# Altium PCB SiLPA_HE.PcbDoc (part 8 of 10)
Units mm, origin at the board's own origin, x right, y up, seen from the top; angles counter-clockwise.
Board outline 222.47 x 100.01 mm, 4 copper layers (Top Layer, Int1 (GND), Int2 (PWR), Bottom Layer), stack 1.508 mm thick; 661 components, 355 nets, 1925 pads, 1744 vias.
Unrouted connection lines stored in the file: 360.
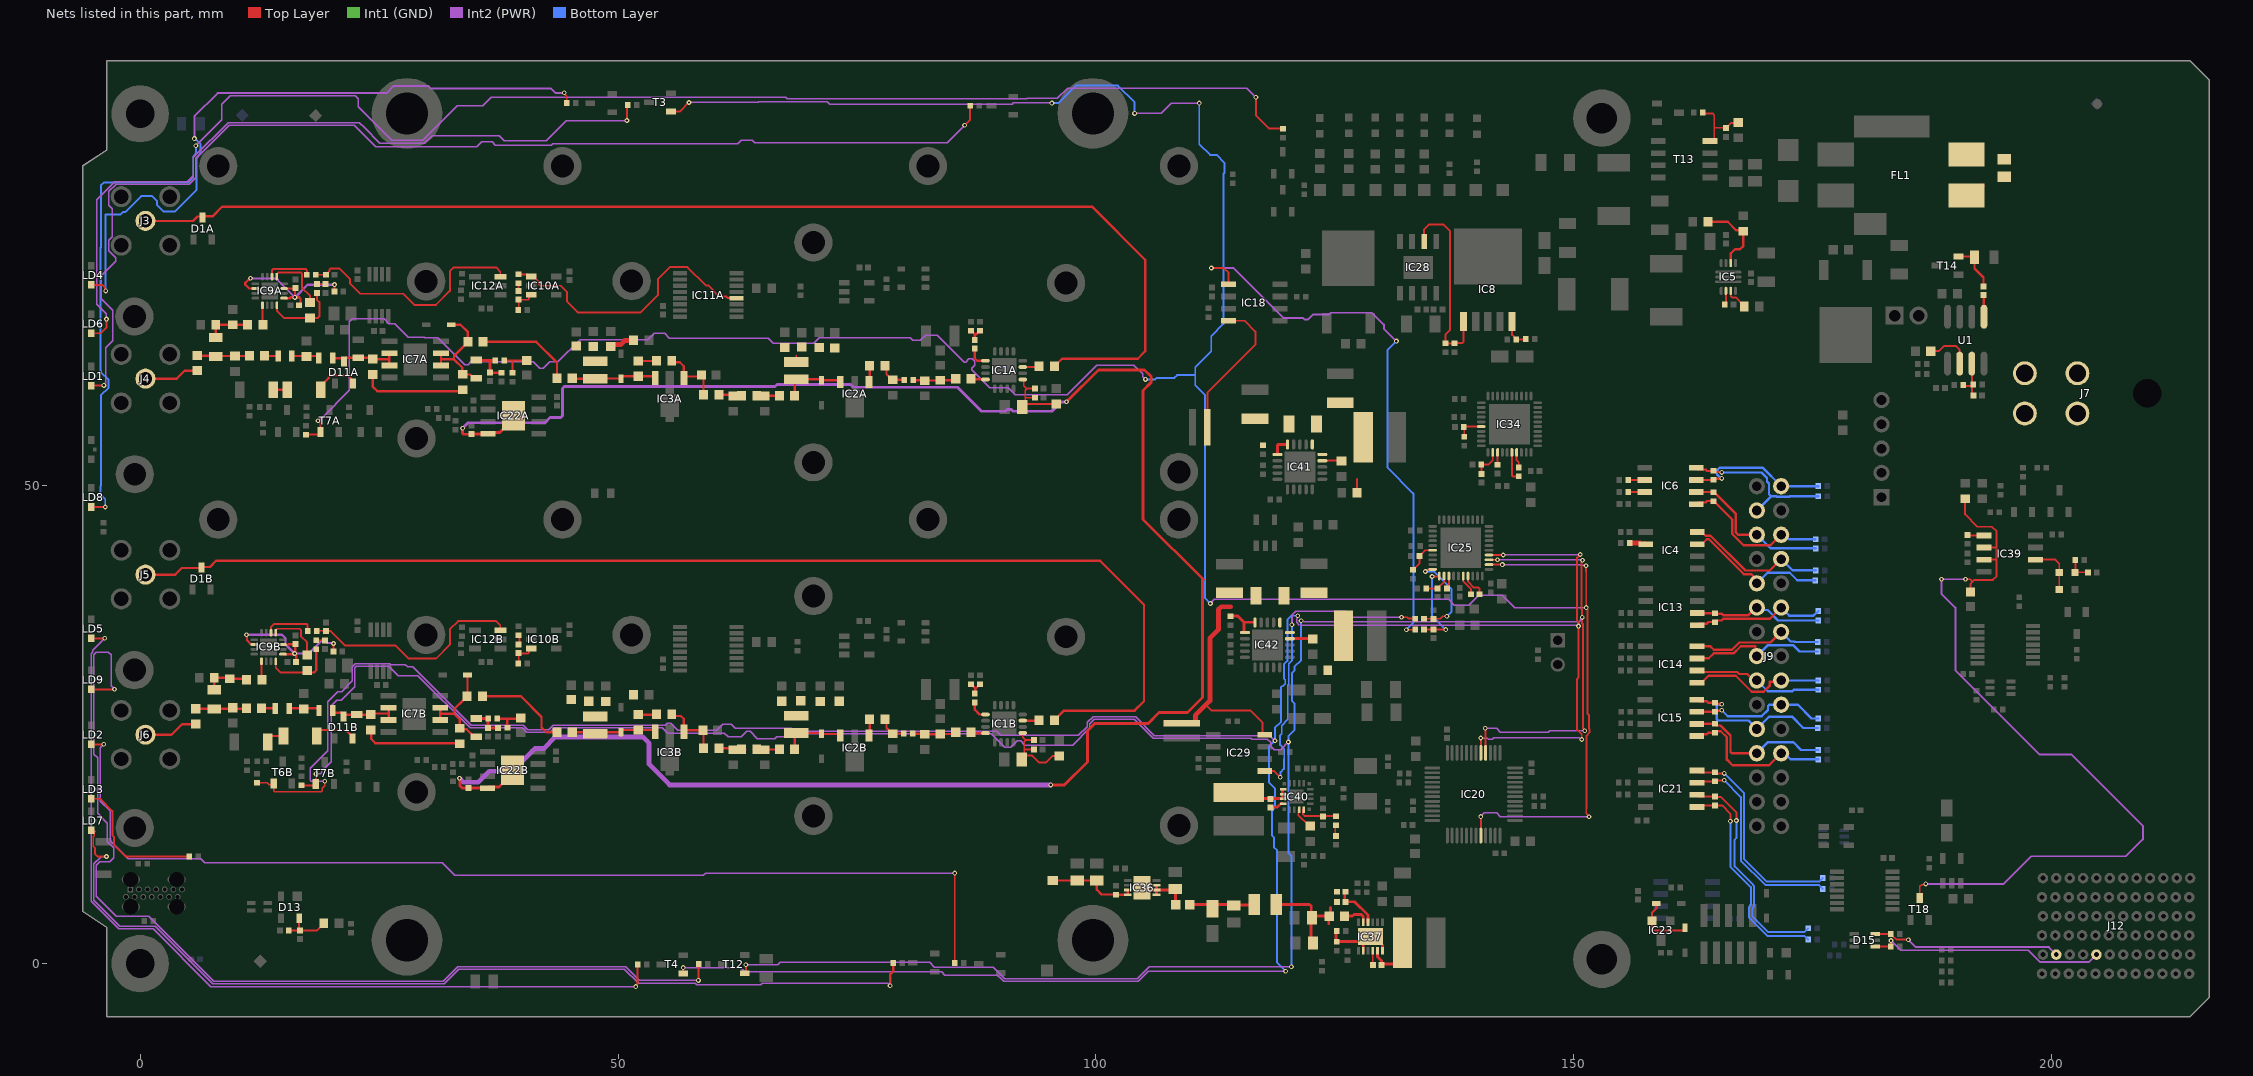
[diagram p7: the nets of this part, all layers, seen from the top]

## Via types
v1: diameter 0.5, hole 0.25, Top Layer to Bottom Layer, tented both sides, 1439 vias
v2: diameter 0.5, hole 0.25, Top Layer to Bottom Layer, tented bottom, 291 vias
v3: diameter 0.5, hole 0.25, Top Layer to Bottom Layer, 12 vias
v4: diameter 0.5, hole 0.25, Top Layer to Bottom Layer, tented top, 2 vias

## Nets (pads, with @x,y where several pads share a name; then routed paths per layer and width w, separated by ;. In a path a pad name is that pad's centre, name@x,y a point inside that pad or via, vN(x,y) a via of type N, cw(c..) or ccw(c..) an arc to the next point about the centre after c; other vN are vias at no path point) (continued)
I_bias0_1: IC20.20 IC25.2 R71A.1 T3.1 T7A.1 | length 320.1
  Top Layer w0.2: R71A.1@17.406,55.355 18.65,55.355 18.875,55.58 18.875,56.513 v1(18.606,56.782) ; T3.1@55.541,89.152 56.491,89.152 v1(57.421,90.083) ; IC20.20@140.263,13.393 v1@140.262,15.371 ; IC25.2@141.117,41.743 v1(142.521,41.743) ; v1(151.262,41.614) 151.262,41.047 151.287,41.023 151.287,37.16 151.433,37.014 151.433,26.127 151.58,25.98 151.58,24.577 151.613,24.544 151.613,24.149 151.317,23.853 151.317,16.236 151.293,16.212 151.293,15.731 151.438,15.586 151.438,15.573 151.58,15.431 v1(151.58,15.35)
  Int2 (PWR) w0.15: v1(18.606,56.782) 18.617,56.782 18.947,57.112 19.053,57.112 21.899,59.958 21.899,67.122 22.211,67.434 25.537,67.434 26.028,66.943 26.653,66.943 28.06,65.536 29.705,65.536 29.786,65.454 31.162,65.454 33.947,62.67 34.321,62.67 34.598,62.947 41.14,62.947 41.799,62.288 42.173,62.288 42.832,62.947 43.708,62.947 46.025,65.263 53.097,65.263 53.78,65.946 54.872,65.946 55.381,65.437 65.693,65.437 66.239,64.891 70.496,64.891 71.061,65.456 80.56,65.456 80.825,65.191 81.614,65.191 82.17,65.746 83.401,65.746 86.234,62.913 86.359,62.913 86.698,63.253 87.073,63.253 87.338,62.988 87.338,62.614 86.998,62.274 86.998,62.15 88.889,60.259 90.83,60.259 91.557,59.532 97.01,59.532 100.091,62.614 103.966,62.614 104.879,61.7 104.879,61.416 v1(105.177,61.118) ; v1(57.421,90.083) 64.653,90.083 64.738,90.168 71.875,90.168 72.133,89.91 91.234,89.91 91.355,90.031 95.375,90.031 v1(95.388,90.018) ; v1(104.037,88.943) 106.81,88.943 107.885,90.018 v1(110.802,90.018) ; v1(111.971,37.668) 112.398,38.095 136.908,38.095 137.503,37.5 139.007,37.5 140.032,38.525 142.514,38.525 143.798,37.241 v1(151.287,37.241) ; v1(140.262,15.372) 140.644,15.754 141.922,15.754 142.309,15.367 151.563,15.367 v1(151.58,15.35) ; v1(142.521,41.743) 150.594,41.743 150.67,41.667 151.209,41.667 v1(151.262,41.614)
  Bottom Layer w0.2: v1(95.388,90.018) 96.052,90.018 97.877,91.843 102.284,91.843 104.037,90.09 v1(104.037,88.943) ; v1(105.177,61.118) 106.19,61.118 106.346,61.274 108.203,61.274 108.487,61.558 110.381,61.558 ; v1(110.802,90.018) 110.802,85.731 111.938,84.596 112.609,84.596 113.433,83.772 113.433,82.709 113.34,82.616 113.34,66.919 112.063,65.642 112.063,64.073 110.381,62.391 110.381,61.558 ; v1(111.971,37.668) 111.42,38.22 111.42,59.446 110.381,60.485 110.381,61.558
I_bias1_0: IC20.41 IC25.4 R62B.1 T4.1 T6B.1 | length 303.8
  Top Layer w0.15: R62B.1@12.184,18.939 13.298,18.939 13.529,18.708 13.768,18.708 13.981,18.494 13.981,18.059 14.069,17.971 18.965,17.971 19.052,18.059 19.052,18.331 19.323,18.602 v1(19.323,19.076)
  Top Layer w0.2: T4.1@56.813,-1.039 v1(56.813,-0.417) ; IC20.41@140.263,22.043 v1(140.263,23.594) ; IC25.4@141.117,42.743 v1(142.605,42.743) ; v1(150.655,42.791) 150.328,42.464 150.328,35.868 150.478,35.718 v1(150.478,35.306) 150.478,29.912 150.335,29.769 150.335,24.455 150.815,23.975 v1(150.815,23.44)
  Int2 (PWR) w0.15: v1(19.323,19.076) 17.871,19.076 17.783,19.164 17.783,20.425 19.612,22.254 19.612,27.407 20.662,28.457 21.069,28.457 22.179,29.567 22.179,31.06 22.508,31.389 26.139,31.389 26.247,31.281 27.753,31.281 27.993,31.041 28.532,31.041 34.63,24.943 40.077,24.943 40.555,24.465 42.768,24.465 43.246,24.943 54.936,24.943 55.139,25.146 55.515,25.146 56.242,24.419 60.317,24.419 60.944,25.046 61.818,25.046 62.255,24.609 68.099,24.609 68.413,24.296 89.599,24.296 90.032,23.863 98.163,23.863 99.094,24.795 99.094,25.225 99.694,25.825 104.145,25.825 106.118,23.852 115.928,23.852 118.173,23.852 v1(118.725,23.3) ; v1(56.813,-0.417) 62.82,-0.417 63.273,-0.87 83.849,-0.87 84.181,-1.201 89.694,-1.201 90.077,-1.584 90.083,-1.584 90.36,-1.861 104.419,-1.861 104.696,-1.584 104.703,-1.584 105.467,-0.82 v1@119.927,-0.82 ; v1(121.1,36.385) 121.033,36.319 121.033,36.086 121.009,36.061 121.009,35.686 121.274,35.42 ; 121.361,35.395 150.294,35.395 150.316,35.373 150.411,35.373 v1(150.478,35.306) ; v1(140.263,23.594) 140.95,23.594 141.074,23.471 141.448,23.471 141.595,23.618 150.544,23.618 150.721,23.44 v1(150.815,23.44) ; v1(142.605,42.743) 142.629,42.767 150.631,42.767 v1(150.655,42.791)
  Bottom Layer w0.2: v1(119.84,-0.795) 118.959,0.086 118.959,11.835 118.603,12.191 118.603,13.19 118.415,13.378 118.415,16.006 118.728,16.318 118.728,18.317 118.09,18.955 118.09,22.665 v1(118.725,23.3) 118.728,23.303 118.728,24.658 119.34,25.271 119.34,28.897 119.457,29.014 119.518,29.014 119.797,29.293 119.797,29.688 119.667,29.818 119.667,31.305 120.024,31.662 120.024,35.961 120.449,36.385 v1(121.1,36.385)
I_bias1_1: IC20.40 IC25.3 R71B.1 T7B.1 T12.1 | length 289.4
  Top Layer w0.2: R71B.1@16.864,18.641 18.241,18.641 T7B.1@18.375,18.775 18.397,18.797 v1(18.397,19.84) ; T12.1@63.265,-0.999 63.377,-0.887 v1(63.377,-0.132) ; v1(140.72,24.624) 140.744,24.6 140.744,22.062 IC20.40@140.763,22.043 ; IC25.3@141.117,42.243 v1(142.011,42.243) ; v1(150.896,42.194) 150.896,42.113 150.785,42.002 150.785,39.187 150.81,39.163 150.81,37.044 150.866,36.988 v1(150.866,36.212) 150.866,35.593 150.955,35.504 150.955,24.609 151.136,24.428 v1(151.136,24.347)
  Int2 (PWR) w0.15: v1(18.397,19.84) 18.403,19.846 18.872,19.846 18.981,19.955 18.981,20.251 19.167,20.436 19.296,20.436 19.981,21.121 19.981,26.981 20.553,27.553 21.037,27.553 22.456,28.973 22.456,30.945 22.622,31.112 26.024,31.112 27,30.135 29.046,30.135 34.515,24.666 39.963,24.666 40.44,24.188 42.883,24.188 43.361,24.666 54.646,24.666 55.19,24.122 61.128,24.122 61.508,23.742 62.915,23.742 63.462,24.289 63.836,24.289 64.584,23.541 66.408,23.541 66.609,23.742 67.897,23.742 68.174,24.019 89.05,24.019 90.435,22.634 91.085,22.634 91.754,23.303 92.128,23.303 92.566,22.865 97.556,22.865 99.371,24.68 99.371,25.11 99.811,25.55 104.029,25.55 106.002,23.577 116.168,23.577 116.271,23.474 117.936,23.474 118.277,23.133 118.277,22.738 118.481,22.534 118.481,22.509 118.63,22.36 119.308,22.36 v1(120.134,23.186) ; v1(63.377,-0.132) 66.7,-0.132 66.969,0.136 82.59,0.136 83.093,-0.367 89.255,-0.367 90.195,-1.307 90.198,-1.307 90.475,-1.584 104.304,-1.584 104.581,-1.307 104.585,-1.307 105.55,-0.342 v1(120.44,-0.342) ; v1(121.462,35.874) 121.529,35.807 121.626,35.807 v1@121.65,35.784 ; 121.737,35.758 150.538,35.758 150.644,35.865 150.644,35.895 150.866,36.117 v1(150.866,36.212) ; v1(140.72,24.624) 141.909,24.624 142.319,24.214 147.328,24.214 147.461,24.347 v1(151.136,24.347) ; v1(142.011,42.243) 150.847,42.243 v1(150.896,42.194)
  Bottom Layer w0.2: v1(120.44,-0.342) 120.44,11.269 120.134,11.575 v1(120.134,23.186) 120.134,23.793 120.762,24.421 120.762,27.215 120.492,27.485 120.492,30.378 120.762,30.648 120.762,31.045 121.462,31.745 v1(121.462,35.874)
Isense_0: IC18.5 R182.2 | length 59.4
  Top Layer w0.2: v1(112.077,72.765) 113.369,72.765 113.865,72.27 113.865,71.071 IC18.5@113.852,71.059 ; v1(132.475,34.925) 133.219,34.925 R182.2@133.291,34.997
  Int2 (PWR) w0.2: v1(112.077,72.765) 114.401,72.765 119.615,67.551 121.655,67.551 121.812,67.394 122.207,67.394 122.723,67.909 124.37,67.909 124.548,68.088 128.87,68.088 130.121,66.837 130.121,66.429 v1(131.43,65.12)
  Bottom Layer w0.2: v1(131.43,65.12) 130.513,64.204 130.513,51.868 133.151,49.23 133.21,49.171 133.21,35.66 v1(132.475,34.925)
Isense_1: IC29.5 R183.2 | length 33.1
  Top Layer w0.2: IC29.5@117.576,20.163 118.597,20.163 v1(119.27,19.49) ; v1(131.964,36.236) 132.585,36.236 132.724,36.097 R183.2@133.291,36.097
  Int2 (PWR) w0.2: v1(120.501,35.438) 120.501,36.461 120.902,36.862 126.079,36.862 126.706,36.236 v1(131.964,36.236)
  Bottom Layer w0.2: v1(119.27,19.49) 119.314,19.533 119.314,20.04 119.65,20.376 119.65,21.393 119.693,21.437 119.693,22.446 119.27,22.869 119.27,23.883 119.438,24.051 119.438,24.906 120.067,25.535 120.067,29.101 120.165,29.199 120.165,31.341 120.501,31.677 v1(120.501,35.438)
LED_bias00: LD4.1 R11.1 | length 71.3
  Top Layer w0.2: -4.723,70.981 -3.914,70.981 -3.658,70.725 -3.658,70.433 v1(-3.6,70.376) ; v1(44.377,91.093) 44.377,90.992 44.632,90.737 44.632,90.058 R11.1@44.647,90.043
  Int2 (PWR) w0.2: v1(5.677,86.305) 5.677,88.643 8.1,91.066 23.099,91.066 25.789,91.066 26.535,91.812 27.901,91.812 30.127,91.812 30.396,91.543 42.99,91.543 43.44,91.093 v1(44.377,91.093)
  Bottom Layer w0.2: v1(-3.6,70.376) -3.6,78.385 -2.029,78.385 -1.768,78.646 -1.512,78.646 0.045,80.203 0.145,80.303 1.22,80.303 1.776,79.748 1.776,79.341 2.419,78.698 3.658,78.698 5.9,80.94 5.9,84.315 6.314,84.73 6.314,85.759 6.035,86.039 6.024,86.039 5.758,86.305 v1(5.677,86.305)
LED_bias01: LD6.1 R12.1 | length 79.1
  Top Layer w0.2: -4.723,65.943 -4.105,65.943 -3.521,66.528 v1(-3.521,67.424) ; v1(50.927,88.197) 50.927,89.708 R12.1@51.022,89.803
  Int2 (PWR) w0.15: v1(-3.521,67.424) -3.521,67.983 -4.523,68.985 -4.523,79.924 -2.634,81.813 4.932,81.813 5.56,82.441 5.56,84.334 9.196,87.97 22.935,87.97 23.429,87.476 23.433,87.476 25.092,85.817 29.751,85.817 30.54,86.606 37.572,86.606 38.078,86.1 42.501,86.1 44.598,88.197 v1(50.927,88.197)
LED_bias10: LD5.1 R14.1 | length 92.2
  Top Layer w0.2: -4.723,34.025 v1(-3.701,34.025) ; v1(51.852,-2.407) 51.852,-2.313 52.033,-2.132 52.033,-0.119 R14.1@52.063,-0.089
  Int2 (PWR) w0.15: v1(-3.701,34.025) -4.95,32.776 -4.95,32.597 -5.127,32.42 -5.127,6.504 -2.245,3.622 1.382,3.622 7.411,-2.407 7.523,-2.407 v1(51.852,-2.407)
LED_bias11: LD9.1 R15.1 | length 104.9
  Top Layer w0.2: -4.723,28.693 v1(-2.682,28.693) ; v1(58.406,-1.76) 58.406,-0.079 R15.1@58.436,-0.049
  Int2 (PWR) w0.15: v1(-2.682,28.693) -3.04,29.052 -3.04,32.291 -3.319,32.57 -4.585,32.57 -4.85,32.305 -4.85,21.915 -4.451,21.516 -4.451,15.719 -3.424,14.692 -3.424,12.754 -2.775,12.105 -2.775,11.086 -3.193,10.667 -4.208,10.667 -4.57,10.305 -4.57,7.028 -2.478,4.936 0.917,4.936 7.701,-1.848 31.703,-1.848 33.242,-0.31 50.791,-0.31 52.241,-1.76 v1(58.406,-1.76)
LED_DIS0: LD1.1 R74.1 | length 121.5
  Top Layer w0.2: -4.723,60.49 v1(-3.79,60.49) ; v1(86.252,87.693) 86.836,88.277 R74.1@86.836,89.743
  Int2 (PWR) w0.15: v1@-3.789,60.49 -3.615,60.752 ; -3.615,60.753 -3.615,64.401 -2.874,65.141 -2.874,68.366 -4.052,69.544 -4.052,71.974 -2.546,73.481 -2.546,73.855 -3.281,74.59 -3.281,75.692 -2.914,76.059 -2.914,78.972 -3.281,79.339 -3.281,80.774 -2.519,81.536 5.158,81.536 5.837,82.216 5.837,84.219 9.311,87.693 22.41,87.693 24.675,85.428 35.211,85.428 35.752,85.97 36.827,85.97 37.175,85.622 43.008,85.622 43.153,85.766 62.516,85.766 62.875,86.125 64.057,86.125 64.31,85.872 84.431,85.872 v1(86.252,87.693)
LED_DIS1: LD2.1 R84.1 | length 111
  Top Layer w0.2: -4.723,22.938 v1(-3.792,22.938) ; R84.1@85.229,0.069 v1(85.229,9.466)
  Int2 (PWR) w0.15: v1(-3.792,22.938) -4.176,22.554 -4.176,16.997 -3.147,15.968 -3.147,12.869 -1.252,10.974 -0.86,10.974 -0.858,10.971 6.358,10.971 6.776,10.553 31.618,10.553 32.94,9.23 58.916,9.23 59.153,9.466 v1(85.229,9.466)
LED_OVT: LD8.1 R64.1 | length 173.6
  Top Layer w0.2: -4.723,47.768 v1(-3.647,47.768) ; v1(116.727,90.643) 116.727,88.735 118.105,87.357 R64.1@119.567,87.357
  Int2 (PWR) w0.15: v1(5.837,85.562) 8.56,88.285 8.56,89.878 9.447,90.764 22.526,90.764 22.797,90.494 22.797,89.652 26.334,86.114 29.574,86.114 33.2,89.74 35.855,89.74 36.755,90.64 49.233,90.64 49.239,90.646 67.542,90.646 67.698,90.49 92.767,90.49 92.799,90.521 95.972,90.521 97.04,91.59 115.78,91.59 v1(116.727,90.643)
  Int1 (GND) w0.2: v1(-3.647,47.768) v1@-3.564,47.768
  Bottom Layer w0.15: 5.006,81.709 5.567,82.27 5.567,84.406 5.677,84.516 5.677,84.587 5.837,84.748
  Bottom Layer w0.2: v1(-3.647,47.768) -3.647,48.59 -4.124,49.067 -4.124,49.966 -4.099,49.991 -4.099,59.44 -3.298,60.24 -3.298,60.274 -3.29,60.283 -3.29,61.076 -4.099,61.885 -4.099,61.999 -4.135,62.035 -4.135,74.894 -4.099,74.93 -4.099,81.416 -3.806,81.709 5.006,81.709 ; 5.837,84.748 v1(5.837,85.562)
LED_P3V3: LD3.1 R13.1 | length 14.4
  Top Layer w0.2: -4.723,17.243 -4.17,17.243 -2.888,15.962 -2.888,13.399 -2.746,13.257 -2.746,12.42 -1.524,11.197 R13.1@5.157,11.197
LED_PGOOD: LD7.1 R100.1 | length 100.2
  Top Layer w0.2: -4.727,13.829 -4.797,13.759 -4.797,13.36 -4.9,13.257 -4.9,12.269 -4.723,12.092 -4.723,11.479 -4.442,11.197 v1(-3.512,11.197)
  Top Layer w0.25: v1(78.462,-2.331) 78.462,-1.137 78.776,-0.823 R100.1@78.776,0.069
  Int2 (PWR) w0.15: v1(-3.512,11.197) -4.089,11.197 -4.847,10.44 -4.847,6.615 -2.13,3.899 1.563,3.899 7.589,-2.128 31.424,-2.128 31.426,-2.125 31.818,-2.125 33.356,-0.587 50.673,-0.587 52.145,-2.059 58.066,-2.059 58.219,-2.212 64.951,-2.212 65.104,-2.059 78.19,-2.059 v1(78.462,-2.331)
LVDS0_N: IC6.4 J9.3 R36.2 R235.2 | length 17
  Top Layer w0.245: IC6.4@162.805,51.868 162.978,51.695 163.772,51.695 163.929,51.538 R36.2@164.62,51.538 164.73,51.428 165.421,51.428 v1(165.468,51.381)
  Bottom Layer w0.245: v1(165.468,51.381) 169.617,51.381 170.052,50.947 170.058,50.94 170.195,50.803 170.195,50.449 170.411,50.233 170.411,49.103 170.627,48.887 ; J9.3@169.141,47.401 170.505,48.765 170.627,48.887 ; R235.2@175.557,48.893 172.571,48.893 172.515,48.837 171.224,48.837 171.174,48.887 170.627,48.887
LVDS0_P: IC6.3 J9.2 R36.1 R145.2 | length 15.3
  Top Layer w0.245: IC6.3@162.805,50.598 R36.1@164.62,50.598 164.73,50.707 165.421,50.707 v1(165.468,50.754)
  Bottom Layer w0.245: v1(165.468,50.754) 165.421,50.801 165.336,50.801 164.964,51.173 164.964,51.59 165.26,51.885 169.737,51.885 J9.2@171.681,49.941 R145.2@175.557,49.941
LVDS1_N: IC6.1 J9.6 R34.1 R236.2 | length 16.1
  Top Layer w0.245: IC6.1@162.805,48.058 162.978,48.231 163.772,48.231 163.929,48.388 R34.1@164.62,48.388 164.64,48.388 164.803,48.225 164.803,48.205 166.562,46.446 166.562,44.934 167.739,43.757 170.577,43.757 J9.6@171.681,44.861
  Bottom Layer w0.245: J9.6@171.681,44.861 172.046,44.861 172.514,44.393 R236.2@175.277,44.393
LVDS1_P: IC6.2 J9.5 R34.2 R146.2 | length 16.1
  Top Layer w0.245: IC6.2@162.805,49.328 R34.2@164.62,49.328 164.64,49.328 166.943,47.025 166.943,45.092 167.174,44.861 J9.5@169.141,44.861
  Bottom Layer w0.245: J9.5@169.141,44.861 170.56,43.443 R146.2@175.307,43.443
LVDS2_N: IC4.7 J9.9 R241.2 | length 15.5
  Top Layer w0.245: IC4.7@162.906,43.878 163.381,43.878 163.889,44.386 164.133,44.386 167.782,40.737 168.567,40.737 168.993,40.311 168.993,39.93 J9.9@169.141,39.781
  Bottom Layer w0.245: J9.9@169.141,39.781 170.253,40.893 172.571,40.893 173.371,40.093 R241.2@175.257,40.093
LVDS2_P: IC4.8 J9.8 R147.2 | length 15.1
  Top Layer w0.245: IC4.8@162.906,45.148 163.381,45.148 163.762,44.767 164.291,44.767 167.94,41.118 170.478,41.118 J9.8@171.681,42.321
  Bottom Layer w0.245: J9.8@171.681,42.321 172.86,41.143 R147.2@175.307,41.143
LVDS3_N: IC13.1 J9.12 R38.1 R242.2 | length 14
  Top Layer w0.245: IC13.1@162.905,35.395 163.078,35.568 163.925,35.568 164.086,35.73 R38.1@164.777,35.73 164.94,35.893 165.447,35.893 165.627,36.073 170.513,36.073 J9.12@171.681,37.241
  Bottom Layer w0.245: J9.12@171.681,37.241 172.523,36.399 175.063,36.399 175.374,36.71 175.394,36.71 175.557,36.873 R242.2@175.557,36.893
LVDS3_P: IC13.2 J9.11 R38.2 R148.2 | length 13.6
  Top Layer w0.245: IC13.2@162.905,36.665 162.908,36.668 164.775,36.668 R38.2@164.777,36.67 164.835,36.613 165.468,36.613 165.627,36.454 168.258,36.454 169.046,37.241 J9.11@169.141,37.241
  Bottom Layer w0.245: J9.11@169.141,37.241 169.399,36.984 170.271,36.984 171.362,35.893 R148.2@175.557,35.893
LVDS4_N: IC14.7 J9.15 R243.2 | length 14.9
  Top Layer w0.245: IC14.7@162.894,31.944 164.112,31.944 164.62,32.452 166.695,32.452 167.451,33.208 168.993,33.208 168.993,32.31 J9.15@169.141,32.161
  Bottom Layer w0.245: J9.15@169.141,32.161 170.298,33.318 172.916,33.318 173.591,32.643 R243.2@175.527,32.643
LVDS4_P: IC14.8 J9.14 R149.2 | length 14
  Top Layer w0.245: IC14.8@162.894,33.214 164.239,33.214 164.62,32.833 166.537,32.833 167.293,33.589 170.569,33.589 J9.14@171.681,34.701
  Bottom Layer w0.245: J9.14@171.681,34.701 172.684,33.699 173.073,33.699 173.129,33.643 R149.2@175.527,33.643
LVDS5_N: IC14.5 J9.18 R168.2 | length 14.4
  Top Layer w0.245: IC14.5@162.894,29.404 163.369,29.404 164.085,30.12 166.925,30.12 168.602,28.443 169.847,28.443 170.5,29.097 170.5,29.49 171.55,29.49 J9.18@171.681,29.621
  Bottom Layer w0.245: J9.18@171.681,29.621 R168.2@175.557,29.621
LVDS5_P: IC14.6 J9.17 R150.2 | length 13.6
  Top Layer w0.245: IC14.6@162.894,30.674 163.067,30.501 167.083,30.501 167.291,30.293 168.143,30.293 168.814,29.621 J9.17@169.141,29.621
  Bottom Layer w0.245: J9.17@169.141,29.621 170.27,28.493 172.865,28.493 173.015,28.643 R150.2@175.557,28.643
LVDS6_N: IC15.4 J9.21 R46.2 R247.2 | length 16.8
  Top Layer w0.245: IC15.4@162.851,27.612 163.024,27.439 163.892,27.439 164.049,27.282 R46.2@164.74,27.282 164.85,27.173 165.413,27.173 v1(165.46,27.126)
  Bottom Layer w0.245: v1(165.46,27.126) 165.413,27.079 165.099,27.079 164.937,26.917 164.937,25.573 165.081,25.429 168.253,25.429 J9.21@169.141,24.541 170.435,25.835 172.805,25.835 173.997,24.643 R247.2@175.527,24.643
LVDS6_P: IC15.3 J9.20 R46.1 R151.2 | length 14.4
  Top Layer w0.245: IC15.3@162.851,26.342 R46.1@164.74,26.342 164.85,26.452 165.413,26.452 v1(165.46,26.499)
  Bottom Layer w0.245: v1(165.46,26.499) 166.091,25.868 169.637,25.868 170.308,26.539 170.308,26.938 170.451,27.081 J9.20@171.681,27.081 173.43,27.081 174.868,25.643 R151.2@175.557,25.643
LVDS7_N: IC15.1 J9.24 R44.1 R248.2 | length 16.5
  Top Layer w0.245: IC15.1@162.851,23.802 163.024,23.975 163.892,23.975 164.049,24.132 R44.1@164.74,24.132 164.903,24.295 165.197,24.295 165.206,24.304 165.369,24.304 166,23.673 166,21.337 166.594,20.743 169.374,20.743 ; 170.423,20.743 J9.24@171.681,22.001
  Top Layer w0.254: 169.374,20.743 170.423,20.743
  Bottom Layer w0.245: J9.24@171.681,22.001 172.046,22.001 172.682,21.365 R248.2@175.557,21.365
LVDS7_P: IC15.2 J9.23 R44.2 R92.2 | length 15.8
  Top Layer w0.245: IC15.2@162.851,25.072 R44.2@164.74,25.072 164.903,24.909 165.324,24.909 166.381,23.852 166.381,22.145 166.525,22.001 J9.23@169.141,22.001
  Bottom Layer w0.245: J9.23@169.141,22.001 170.308,23.168 172.939,23.168 173.77,22.337 R92.2@175.557,22.337
LVDS8_N: IC21.1 R26.1 R122.2 | length 22.9
  Top Layer w0.2: IC21.1@162.877,16.383 163.032,16.538 R26.1@164.775,16.538 165.495,16.538 166.374,15.66 v1(166.374,14.882)
  Bottom Layer w0.2: v1(166.374,14.882) 166.374,10.138 168.507,8.004 168.507,6.101 168.333,5.926 168.333,4.797 169.023,4.107 170.24,2.89 174.111,2.89 174.288,2.713 174.308,2.713 174.498,2.523 R122.2@174.498,2.503
LVDS8_P: IC21.2 R26.2 R120.2 | length 23.5
  Top Layer w0.2: IC21.2@162.877,17.653 163.052,17.478 R26.2@164.775,17.478 164.817,17.436 165.385,17.436 166.995,15.826 v1(166.995,14.968)
  Bottom Layer w0.2: v1(166.995,14.968) 166.995,13.15 166.802,12.958 166.802,10.172 168.738,8.236 168.834,8.14 168.834,5.965 168.66,5.791 168.66,4.932 170.308,3.284 174.089,3.284 174.288,3.484 174.308,3.484 174.498,3.674 R120.2@174.498,3.694
LVDS9_N: IC21.4 R118.2 R123.2 | length 22.2
  Top Layer w0.2: IC21.4@162.877,20.193 163.067,20.003 R118.2@164.775,20.003 164.882,19.897 v1(165.728,19.897)
  Bottom Layer w0.2: v1(165.728,19.897) 167.799,17.826 167.799,10.916 170.149,8.567 175.651,8.567 175.817,8.733 175.837,8.733 176.027,8.923 R123.2@176.027,8.943
LVDS9_P: IC21.3 R118.1 R121.2 | length 21.9
  Top Layer w0.2: IC21.3@162.877,18.923 163.017,19.063 R118.1@164.775,19.063 164.882,19.17 v1(165.728,19.17)
  Bottom Layer w0.2: v1(165.728,19.17) 167.472,17.426 167.472,10.781 170.013,8.24 175.512,8.24 175.513,8.238 175.602,8.238 175.817,8.023 175.837,8.023 176.027,7.833 R121.2@176.027,7.813
N5V0: C127.2 C128.2 D19.2 IC36.7 IC36.8 R129.2 | length 10
  Top Layer w0.245: D19.2@95.272,8.693 98.051,8.693 C127.2@100.079,8.693 100.079,7.735 100.591,7.223 R129.2@102.108,7.223 102.123,7.208 103.311,7.208 IC36.8@103.326,7.193 IC36.7@103.326,7.693 ; D19.2@95.462,8.494 D19.2@95.661,8.693
N5V0A: C121A.2 C121B.2 IC22A.4 IC22A.9 IC22B.4 IC22B.9 | length 218.7
  Top Layer w0.3: v1(33.418,19.377) 33.456,19.339 33.456,18.606 33.699,18.363 C121B.2@34.374,18.363 ; v1(33.739,56.007) 33.739,55.474 33.832,55.38 C121A.2@34.68,55.38 34.703,55.403 36.384,55.403 IC22A.4@36.407,55.425 36.543,55.561 37.632,55.561 39.057,56.986 IC22A.9@39.057,57.33 ; C121B.2@34.44,18.373 C121B.2@34.604,18.373 ; C121B.2@34.621,18.356 36.313,18.356 IC22B.4@36.33,18.338 36.466,18.474 37.555,18.474 38.98,19.899 IC22B.9@38.98,20.243 ; v1(95.26,18.691) 96.69,18.691 99.097,21.098 99.097,22.098 99.117,22.118 99.117,22.574 99.097,22.594 99.097,24.347 99.874,25.125 105.472,25.125 106.604,26.257 109.564,26.257 111.153,27.846 111.153,40.189 ; v1(96.919,58.769) 100.261,62.111 105.092,62.111 105.789,61.414 105.789,60.822 104.932,59.965 104.932,46.472 111.24,40.164
  Int2 (PWR) w0.3: v1(33.739,56.007) 34.313,56.581 42.347,56.581 42.89,57.124 44.007,57.124 44.192,57.309 44.192,60.179 44.368,60.355 66.425,60.355 66.653,60.583 74.328,60.583 74.619,60.291 85.502,60.291 88.011,57.783 90.532,57.783 90.705,57.955 91.141,57.955 91.314,57.783 95.376,57.783 96.362,58.769 v1(96.919,58.769)
  Int2 (PWR) w0.5: v1(33.418,19.377) 33.816,18.979 35.387,18.979 36.536,20.128 38.929,20.128 41.296,22.495 42.22,22.495 43.44,23.715 52.573,23.715 53.243,23.045 53.243,20.844 55.396,18.691 v1(95.26,18.691)
N6V0: C130.1 C131.1 C134.1 C135.2 C136.2 IC37.8 IC37.12 IC37.13 L17.1 R130.1 R134.1 | length 19.3
  Top Layer w0.3: L17.1@118.752,6.186 122.351,6.186 122.526,6.01 122.526,4.858 C135.2@122.499,4.831 ; C136.2@122.6,2.18 122.499,2.28 C135.2@122.499,4.831 ; 124.346,4.194 124.346,4.942 C130.1@124.32,4.968 ; 124.54,5.884 124.54,5.188 C130.1@124.32,4.968 ; R130.1@125.104,3.435 125.104,2.308 IC37.13@128.078,2.308 ; IC37.8@127.961,1.329 127.961,2.079 IC37.13@128.711,2.829 ; IC37.13@128.993,2.909 129.961,1.941 IC37.12@129.961,1.329 ; C135.2@122.499,4.831 122.637,4.968 C130.1@124.32,4.968
N6V0A: C125.2 C129.2 L17.2 L18.1 | length 7.3
  Top Layer w0.3: L18.1@109.739,6.172 112.09,6.172 114.286,6.172 114.34,6.118 116.002,6.118 116.452,6.568 L17.2@116.452,6.968
N6V0A1: C126.2 IC36.1 IC36.2 IC36.3 IC36.9 L18.2 | length 6.3
  Top Layer w0.3: IC36.9@104.826,7.943 105.076,7.693 IC36.2@106.326,7.693 ; IC36.1@106.326,7.193 IC36.2@106.326,7.693 ; IC36.3@106.326,8.193 IC36.2@106.326,7.693 ; L18.2@108.326,6.147 108.311,6.161 C126.2@108.311,7.793 108.211,7.693 IC36.2@106.326,7.693
NetC1A_1: C1A.1 IC1A.9 | length 2.2
  Top Layer w0.245: C1A.1@87.317,64.333 87.317,63.318 87.571,63.064 IC1A.9@88.439,63.064
NetC1A_2: C1A.2 R1A.2 R2A.2 | length 1.9
  Top Layer w0.245: R1A.2@86.927,66.223 86.947,66.223 87.317,65.853 ; C1A.2@87.317,65.233 87.317,65.853 ; R2A.2@87.867,66.213 87.847,66.213 87.487,65.853 87.317,65.853
NetC1B_1: C1B.1 IC1B.9 | length 2.1
  Top Layer w0.245: C1B.1@87.317,27.333 87.317,26.569 87.823,26.064 IC1B.9@88.439,26.064
NetC1B_2: C1B.2 R1B.2 R2B.2 | length 1.6
  Top Layer w0.245: R1B.2@86.927,29.223 86.947,29.223 87.352,28.818 87.352,28.793 ; C1B.2@87.317,28.233 87.38,28.296 87.38,28.746 R2B.2@87.727,29.093
NetC2A_2: C2A.2 C15A.2 IC3A.1 R3A.1 | length 6.8
  Top Layer w0.245: R3A.1@55.627,63.083 55.627,63.033 55.756,62.904 56.463,62.904 56.868,62.499 56.868,61.687 56.871,61.685 56.902,61.685 IC3A.1@56.902,61.444 ; IC3A.1@56.902,61.258 IC3A.1@56.902,61.444 ; C2A.2@58.737,61.563 58.585,61.411 56.936,61.411 IC3A.1@56.902,61.444 ; C15A.2@58.947,59.513 C2A.2@58.947,61.593
NetC2B_2: C2B.2 C15B.2 IC3B.1 R3B.1 | length 6.8
  Top Layer w0.245: R3B.1@55.627,26.083 55.627,26.033 55.756,25.904 56.57,25.904 56.868,25.606 56.868,24.687 56.871,24.685 56.902,24.685 IC3B.1@56.902,24.444 ; IC3B.1@56.902,24.258 IC3B.1@56.902,24.444 ; C2B.2@58.737,24.563 58.585,24.411 56.936,24.411 IC3B.1@56.902,24.444 ; C15B.2@58.947,22.513 C2B.2@58.947,24.593
NetC3A_1: C3A.1 R3A.2 | length 1.9
  Top Layer w0.245: C3A.1@52.117,63.043 53.987,63.043 R3A.2@54.027,63.083
NetC3A_2: C3A.2 C16A.1 D3A.2 IC3A.3 L4A.2 | length 9
  Top Layer w0.245: C16A.1@45.207,61.214 45.225,61.196 L4A.2@47.609,61.196 ; L4A.2@47.627,61.178 L4A.2@47.609,61.196 ; C3A.2@52.117,61.433 53.868,61.433 53.902,61.399 IC3A.3@53.902,61.258 ; C3A.2@52.117,61.443 50.5,61.443 50.317,61.26 D3A.2@50.317,61.203 47.616,61.203 L4A.2@47.609,61.196
NetC3B_1: C3B.1 R3B.2 | length 1.9
  Top Layer w0.245: C3B.1@52.117,26.043 53.987,26.043 R3B.2@54.027,26.083
NetC3B_2: C3B.2 C16B.1 D3B.2 IC3B.3 L4B.2 | length 9
  Top Layer w0.245: C16B.1@45.207,24.214 45.225,24.196 L4B.2@47.609,24.196 ; L4B.2@47.627,24.178 L4B.2@47.609,24.196 ; C3B.2@52.117,24.433 53.868,24.433 53.902,24.399 IC3B.3@53.902,24.258 ; C3B.2@52.117,24.443 50.5,24.443 50.317,24.26 D3B.2@50.317,24.203 47.616,24.203 L4B.2@47.609,24.196
NetC4A_2: C4A.2 C5A.2 C6A.2 L1A.2 L3A.1 | length 0.7
  Top Layer w0.2: L3A.1@68.647,62.928 68.647,63.613
NetC4B_2: C4B.2 C5B.2 C6B.2 L1B.2 L3B.1
NetC7A_2: C7A.2 C8A.2 C9A.2 L2A.1 L4A.1 | length 3.2
  Top Layer w0.152: L2A.1@51.222,64.818 L2A.1@51.617,65.213
  Top Layer w0.5: C7A.2@49.227,64.543 49.443,64.759 50.262,64.759 50.685,65.182 51.586,65.182 L2A.1@51.617,65.213
NetC7B_2: C7B.2 C8B.2 C9B.2 L2B.1 L4B.1
NetC11A_1: C11A.1 D1A.3 J3.1 | length 127.2
  Top Layer w0.245: J3.1@0.561,77.693 5.525,77.693 5.99,78.157 6.529,78.157 6.539,78.167 7.575,78.167 8.601,79.193 99.577,79.193 105.143,73.627 105.143,64.051 104.36,63.268 96.452,63.268 95.836,62.652 95.811,62.652 95.657,62.498 C11A.1@95.657,62.473
NetC11A_2: C11A.2 IC1A.3 | length 1.9
  Top Layer w0.245: IC1A.3@92.339,62.414 93.759,62.414 93.878,62.294 93.903,62.294 94.057,62.448 C11A.2@94.057,62.473
NetC11B_1: C11B.1 D1B.3 J5.1 | length 127.3
  Top Layer w0.245: J5.1@0.561,40.693 3.673,40.693 4.361,41.381 6.423,41.381 6.427,41.384 6.427,41.484 6.431,41.487 7.298,41.487 7.944,42.133 100.436,42.133 105.027,37.542 105.027,27.443 104.045,26.461 96.645,26.461 C11B.1@95.657,25.473
NetC11B_2: C11B.2 IC1B.3 | length 1.8
  Top Layer w0.245: IC1B.3@92.339,25.414 94.023,25.414 94.057,25.448 C11B.2@94.057,25.473
NetC12A_1: C12A.1 IC1A.12 | length 1.5
  Top Layer w0.245: C12A.1@86.927,61.193 87.006,61.114 IC1A.12@88.439,61.114
NetC12A_2: C12A.2 R4A.2 R7A.2 R101A.1 | length 4.5
  Top Layer w0.245: R101A.1@80.907,61.023 82.067,61.023 R7A.2@82.097,60.993 82.107,61.003 83.677,61.003 R4A.2@83.687,61.013 85.172,61.013 85.327,61.168 C12A.2@85.327,61.193
NetC12B_1: C12B.1 IC1B.12 | length 1.5
  Top Layer w0.245: C12B.1@86.927,24.193 87.006,24.114 IC1B.12@88.439,24.114
NetC12B_2: C12B.2 R4B.2 R7B.2 R101B.1 | length 4.6
  Top Layer w0.245: R101B.1@80.907,24.053 82.057,24.053 R7B.2@82.107,24.003 ; R7B.2@82.067,24.023 R7B.2@82.097,23.993 R7B.2@82.107,24.003 ; C12B.2@85.327,24.193 85.327,24.168 85.172,24.013 R4B.2@83.687,24.013 83.677,24.003 R7B.2@82.107,24.003
NetC13A_1: C13A.1 R8A.2 R101A.2 | length 3.1
  Top Layer w0.245: C13A.1@77.927,62.543 78.081,62.389 78.081,61.659 78.677,61.063 R101A.2@79.967,61.063
NetC13A_2: C13A.2 IC2A.1 | length 1.7
  Top Layer w0.245: IC2A.1@76.26,60.837 76.289,60.866 76.289,61.199 76.327,61.237 C13A.2@76.327,62.543
NetC13B_1: C13B.1 R8B.2 R101B.2 | length 2.9
  Top Layer w0.245: C13B.1@77.927,25.543 78.081,25.389 78.081,24.659 78.677,24.063 R101B.2@79.796,24.063
NetC13B_2: C13B.2 IC2B.1 | length 1.4
  Top Layer w0.245: IC2B.1@76.302,24.118 76.327,24.143 C13B.2@76.327,25.543
NetC14A_1: C14A.1 D2A.2 IC2A.3 L3A.2 | length 6.6
  Top Layer w0.245: C14A.1@68.477,59.422 68.477,60.948 L3A.2@68.647,61.118 71.277,61.118 D2A.2@71.277,61.023 73.231,61.023 73.26,60.994 IC2A.3@73.26,60.837
NetC14A_2: C14A.2 R5A.1 R9A.2 | length 2.4
  Top Layer w0.245: R5A.1@64.467,59.402 66.858,59.402 C14A.2@66.877,59.422
NetC14B_1: C14B.1 D2B.2 IC2B.3 L3B.2 | length 6.6
  Top Layer w0.245: C14B.1@68.477,22.422 68.477,23.948 L3B.2@68.647,24.118 71.277,24.118 D2B.2@71.277,24.023 73.231,24.023 73.26,23.994 IC2B.3@73.26,23.837
NetC14B_2: C14B.2 R5B.1 R9B.2 | length 2.7
  Top Layer w0.245: R5B.1@64.187,22.402 66.858,22.402 C14B.2@66.877,22.422
NetC15A_1: C15A.1 R5A.2 R10A.2 | length 2.7
  Top Layer w0.245: C15A.1@60.547,59.513 62.747,59.513 62.857,59.403 R5A.2@63.247,59.403
NetC15B_1: C15B.1 R5B.2 R10B.2 | length 2.8
  Top Layer w0.245: C15B.1@60.547,22.513 R10B.2@62.037,22.513 ; R10B.2@62.037,22.383 R5B.2@63.314,22.383
NetC16A_2: C16A.2 C49A.2 | length 10.5
  Top Layer w0.245: C49A.2@35.889,65.047 41.428,65.047 43.607,62.869 C16A.2@43.607,61.214 43.607,61.193 C16A.2@43.454,61.039
NetC16B_2: C16B.2 C49B.2 | length 10
  Top Layer w0.245: C49B.2@35.805,27.96 39.838,27.96 41.996,25.802 41.996,24.707 42.489,24.214 C16B.2@43.607,24.214
NetC17A_1: C17A.1 C18A.2 C19A.2 IC1A.1 L5A.1 | length 7.9
  Top Layer w0.2: C18A.2@92.423,58.476 C18A.2@92.503,58.556 ; 92.445,60.897 92.445,60.468 92.757,60.156 ; C17A.1@93.613,60.156 92.757,60.156 ; C19A.2@93.623,59.196 92.601,59.196 ; L5A.1@95.823,58.556 C18A.2@92.503,58.556 ; C18A.2@92.503,58.556 92.601,58.654 92.601,59.196 ; 92.601,59.196 92.601,60 92.757,60.156
NetC17B_1: C17B.1 C18B.2 C19B.2 IC1B.1 L5B.1 | length 8.9
  Top Layer w0.2: C18B.2@92.317,21.693 C18B.2@92.397,21.773 ; IC1B.1@92.339,24.114 92.339,23.685 92.651,23.373 ; C17B.1@93.507,23.373 92.651,23.373 ; C19B.2@93.517,22.413 92.495,22.413 ; L5B.1@96.176,21.72 95.461,21.72 95.033,21.292 94.785,21.044 94.016,21.044 93.287,21.773 C18B.2@92.397,21.773 ; C18B.2@92.397,21.773 92.495,21.871 92.495,22.413 ; 92.495,22.413 92.495,23.217 92.651,23.373
NetC20_1: C20.1 FL1.3 J7.1 J7.2
NetC20_2: C20.2 FL1.1 J7.3 J7.4 | length 2.1
  Top Layer w0.508: FL1.1@191.727,80.359 FL1.1@192.723,81.355
  Top Layer w1.27: FL1.1@191.077,80.359 FL1.1@191.727,80.359
NetC23_2: C23.2 IC34.26 R97.1 | length 2.9
  Top Layer w0.2: R97.1@138.527,55.113 138.527,56.143 C23.2@138.477,56.143 138.477,56.174 IC34.26@140.311,56.174
NetC24_2: C24.2 IC34.33 | length 1.3
  Top Layer w0.2: C24.2@141.991,52.182 142.011,52.202 IC34.33@142.011,53.474
NetC25_2: C25.2 IC34.32 R96.1 | length 3.2
  Top Layer w0.2: C25.2@140.311,51.216 140.329,51.234 R96.1@140.329,52.2 141.061,52.2 141.511,52.65 IC34.32@141.511,53.474
NetC26_1: C26.1 IC34.36 | length 3.2
  Top Layer w0.2: IC34.36@143.511,53.474 143.511,51.055 143.628,50.938 144.183,50.938 C26.1@144.225,50.98
NetC26_2: C26.2 IC34.37 | length 1.7
  Top Layer w0.2: IC34.37@144.011,53.474 144.011,52.679 144.225,52.465 C26.2@144.225,51.88
NetC36_1: C36.1 IC5.9 | length 1.5
  Top Layer w0.2: C36.1@165.677,68.943 165.906,69.172 IC5.9@165.906,70.383
NetC39_2: C39.2 IC41.15 IC41.16 L11.2 R137.2 R155.1 | length 2.4
  Top Layer w0.2: L11.2@127.257,54.36 L11.2@127.956,55.06 ; R137.2@127.307,49.26 127.307,50.683
NetC40_2: C40.2 IC18.8 IC41.1 IC41.20 R140.2 R155.2 R173.1 | length 17.5
  Top Layer w0.2: R173.1@111.656,56.118 111.656,59.714 116.682,64.74 116.682,66.123 115.556,67.249 IC18.8@113.852,67.249
  Top Layer w0.3: IC41.1@118.98,53.26 118.98,54.264 119.027,54.31 IC41.20@120.03,54.31
NetC41A_1: C41A.1 R21A.2 | length 11
  Top Layer w0.245: C41A.1@24.327,61.643 24.327,60.377 24.815,59.889 33.624,59.889 R21A.2@33.768,60.033
NetC41A_2: C41A.2 D11A.3 IC7A.6 IC7A.7 L12A.1 L15A.1 | length 7.7
  Top Layer w0.245: L15A.1@20.142,63.343 21.125,63.343 D11A.3@21.327,63.141 ; D11A.3@21.327,63.209 D11A.3@21.327,62.993 21.327,63.171 21.529,63.373 24.197,63.373 C41A.2@24.327,63.243 ; C41A.2@24.425,63.209 26.077,63.209 ; IC7A.7@26.077,62.574 26.077,63.209 ; IC7A.6@26.077,63.844 26.077,63.209
NetC41B_1: C41B.1 R21B.2 | length 10.4
  Top Layer w0.245: C41B.1@24.135,24.437 24.176,24.397 24.176,23.494 24.612,23.058 R21B.2@33.418,23.058
NetC41B_2: C41B.2 D11B.3 IC7B.6 IC7B.7 L12B.1 L15B.1 | length 7.7
  Top Layer w0.245: L15B.1@20.144,26.483 20.144,26.405 20.306,26.243 21.062,26.243 21.264,26.041 D11B.3@21.264,25.857 21.444,26.037 22.653,26.037 C41B.2@24.135,26.037 24.253,26.155 26,26.155 ; IC7B.7@26,25.487 26,26.037 26,26.155 ; IC7B.6@26,26.757 26,26.155
NetC42A_2: C42A.2 R18A.1 R19A.1 | length 3.6
  Top Layer w0.245: R19A.1@38.128,63.091 38.964,63.091 ; R18A.1@38.964,61.822 38.964,63.091 ; C42A.2@40.441,63.091 38.964,63.091
NetC42B_2: C42B.2 R18B.1 R19B.1 | length 3.5
  Top Layer w0.245: R19B.1@37.357,25.622 38.427,25.622 ; R18B.1@38.427,24.663 38.427,25.622 ; C42B.2@39.801,25.912 39.511,25.622 38.427,25.622
NetC43A_2: C43A.2 C45A.2 L13A.1 R19A.2 | length 4.5
  Top Layer w0.3: L13A.1@35.177,63.073 36.611,63.073 ; L13A.1@35.177,63.143 L13A.1@35.338,62.982 ; C45A.2@36.611,61.827 36.611,63.073 ; C45A.2@36.777,61.816 37.807,61.816 C43A.2@37.816,61.807 ; R19A.2@37.17,63.073 36.611,63.073
NetC43B_2: C43B.2 C45B.2 L13B.1 R19B.2 | length 2.8
  Top Layer w0.3: L13B.1@35.438,25.655 R19B.2@36.332,25.655 ; C45B.2@36.405,24.646 R19B.2@36.405,25.493 ; C45B.2@36.408,24.643 C43B.2@37.427,24.643
NetC44A_1: C44A.1 C50A.2 C118A.2 R73A.2 | length 5.5
  Top Layer w0.245: C44A.1@5.97,63.633 5.97,63.572 7.929,63.572 7.929,63.57 C50A.2@11.432,63.57
NetC44A_2: C44A.2 J4.1 | length 5.8
  Top Layer w0.245: J4.1@0.561,61.193 3.825,61.193 4.665,62.033 C44A.2@5.97,62.033
NetC44B_1: C44B.1 C50B.2 C118B.2 R73B.2 | length 5.3
  Top Layer w0.245: C44B.1@5.842,26.657 7.775,26.657 9.705,26.657 11.056,26.657 C50B.2@11.109,26.71
NetC44B_2: C44B.2 J6.1 | length 5.9
  Top Layer w0.245: J6.1@0.561,23.943 3.278,23.943 4.378,25.043 C44B.2@6.007,25.043
NetC49A_1: C49A.1 D8A.2 IC7A.2 IC7A.3 L13A.2 R21A.1 | length 11.2
  Top Layer w0.245: IC7A.2@31.477,62.574 31.477,63.209 ; IC7A.3@31.477,63.844 31.477,63.209 ; D8A.2@32.553,66.836 33.516,66.836 34.289,66.063 C49A.1@34.289,65.047 34.289,65.022 32.841,63.574 32.841,63.209 ; R21A.1@33.718,61.633 R21A.1@33.768,61.633 ; L13A.2@34.75,61.411 34.75,61.42 34.727,61.443 34.718,61.443 34.542,61.619 33.782,61.619 R21A.1@33.768,61.633 ; 31.477,63.209 32.841,63.209 ; 32.841,63.209 33.697,62.353 33.697,61.704 R21A.1@33.768,61.633
NetC49B_1: C49B.1 D8B.2 IC7B.2 IC7B.3 L13B.2 R21B.1 | length 11.3
  Top Layer w0.245: IC7B.2@31.4,25.487 31.4,26.122 ; IC7B.3@31.4,26.757 31.4,26.122 ; C49B.1@34.205,27.96 C49B.1@34.205,27.935 ; D8B.2@34.248,30.202 34.248,27.979 C49B.1@34.205,27.935 ; L13B.2@35.177,23.743 34.927,23.743 34.171,24.499 33.551,24.499 R21B.1@33.447,24.603 33.447,25.549 32.874,26.122 ; 31.4,26.122 32.874,26.122 ; 32.874,26.122 32.874,26.63 33.827,27.583 33.852,27.583 C49B.1@34.205,27.935
NetC50A_1: C50A.1 L16A.2 | length 1.4
  Top Layer w0.245: C50A.1@13.033,63.57 L16A.2@14.446,63.57
NetC50B_1: C50B.1 L16B.2 | length 1.4
  Top Layer w0.245: C50B.1@12.709,26.71 L16B.2@14.159,26.71
NetC51A_1: C51A.1 IC10A.3 R52A.2 | length 2.8
  Top Layer w0.2: R52A.2@39.613,68.557 39.613,69.257 39.427,69.443 40.588,69.443 40.677,69.532 40.677,69.749 40.901,69.973 IC10A.3@40.917,69.973
NetC51A_2: C51A.2 R23A.1 | length 0.8
  Top Layer w0.2: C51A.2@39.587,70.373 R23A.1@39.587,71.195
NetC51B_1: C51B.1 IC10B.3 R52B.2 | length 2.8
  Top Layer w0.2: R52B.2@39.613,31.557 39.613,32.257 39.427,32.443 40.588,32.443 40.677,32.532 40.677,32.749 40.901,32.973 IC10B.3@40.917,32.973
NetC51B_2: C51B.2 R23B.1 | length 1.1
  Top Layer w0.2: C51B.2@39.587,33.373 39.677,33.463 R23B.1@39.677,34.443
NetC52A_1: C52A.1 R27A.2 R73A.1 R164A.2 | length 4.6
  Top Layer w0.245: R73A.1@7.925,65.5 R164A.2@7.925,66.825 C52A.1@11.244,66.825
NetC52A_2: C52A.2 IC9A.1 | length 2.1
  Top Layer w0.254: IC9A.1@12.802,68.869 12.802,66.867 C52A.2@12.844,66.825
NetC52B_1: C52B.1 R27B.2 R73B.1 R164B.2 | length 4.7
  Top Layer w0.245: R73B.1@7.77,28.7 R164B.2@7.77,29.9 ; R164B.2@7.775,29.9 9.275,29.9 R27B.2@9.375,29.8 11.05,29.8 C52B.1@11.15,29.7
NetC52B_2: C52B.2 IC9B.1 | length 1.6
  Top Layer w0.245: IC9B.1@12.671,31.563 IC9B.1@12.692,31.584 ; C52B.2@12.692,30.09 IC9B.1@12.692,31.584 ; IC9B.1@12.692,31.623 IC9B.1@12.692,31.584
NetC53A_2: C53A.2 IC12A.3 R24A.2 | length 24.9
  Top Layer w0.2: R24A.2@18.384,72.064 19.203,72.064 19.312,72.174 C53A.2@19.312,72.189 ; C53A.2@19.437,72.064 19.8,72.427 19.8,72.582 19.917,72.699 20.876,72.699 21.97,71.605 21.97,71.117 23.008,70.079 27.507,70.079 28.676,68.91 30.955,68.91 32.41,70.365 32.41,72.45 32.79,72.83 37.238,72.83 37.677,72.391 IC12A.3@37.677,71.943
NetC53B_2: C53B.2 IC12B.3 R24B.2 | length 23.7
  Top Layer w0.2: R24B.2@18.474,34.818 C53B.2@19.445,34.818 ; C53B.2@19.327,34.792 19.937,34.792 21.461,33.269 26.728,33.269 28.086,31.91 30.955,31.91 32.41,33.365 32.41,34.96 33.269,35.82 37.248,35.82 37.677,35.391 IC12B.3@37.677,34.943
NetC54A_1: C54A.1 IC9A.4 R31A.2 | length 8
  Top Layer w0.2: IC9A.4@14.302,68.869 14.302,68.293 15.045,67.55 C54A.1@17.775,67.55 18.591,67.55 18.755,67.714 18.755,69.194 18.5,69.449 R31A.2@18.5,70.155
NetC54A_2: C54A.2 IC9A.9 | length 6.4
  Top Layer w0.2: IC9A.9@14.302,71.869 14.302,72.115 14.492,72.305 16.831,72.305 16.929,72.208 16.929,70.707 17.775,69.861 C54A.2@17.775,69.15
NetC54B_1: C54B.1 IC9B.4 R31B.2 | length 7.6
  Top Layer w0.2: IC9B.4@14.192,31.623 14.192,30.938 14.659,30.471 17.268,30.471 C54B.1@17.468,30.671
  Top Layer w0.245: C54B.1@17.468,30.671 17.69,30.449 18.192,30.449 18.427,30.684 R31B.2@18.427,32.878
NetC54B_2: C54B.2 IC9B.9 | length 5.9
  Top Layer w0.2: IC9B.9@14.192,34.623 14.192,34.861 14.359,35.028 16.485,35.028 16.709,35.028 16.817,34.92 16.817,34.245 17.468,33.594 C54B.2@17.468,32.271
NetC55A_1: C55A.1 R31A.1 | length 1
  Top Layer w0.2: R31A.1@18.337,71.089 18.357,71.069 C55A.1@19.332,71.069
NetC55B_1: C55B.1 R31B.1 | length 1
  Top Layer w0.2: R31B.1@18.227,33.843 18.247,33.823 C55B.1@19.222,33.823
NetC59A_2: C59A.2 C60A.1 FB2A.2 IC9A.5 IC9A.7 IC9A.14 | length 17.8
  Top Layer w0.245: v1(11.551,71.685) 11.482,71.685 11.015,71.218 11.015,71.015 11.41,70.619 IC9A.14@12.052,70.619 ; IC9A.5@15.052,69.619 15.671,69.619 15.744,69.692 16.101,69.692 v1@16.169,69.76 ; IC9A.7@15.052,70.619 15.061,70.628 C60A.1@16.23,70.628 ; C60A.1@16.271,70.669 C60A.1@16.23,70.628 ; C59A.2@16.634,68.874 16.778,69.018 16.778,69.55 16.635,69.694 v1(16.197,69.694) 16.197,70.595 C60A.1@16.23,70.628 ; FB2A.2@20.332,70.319 v1(20.332,71.032)
  Int2 (PWR) w0.2: v1(11.551,71.685) 11.555,71.689 14.264,71.689 14.431,71.523 14.431,71.46 v1(16.197,69.694)
  Int2 (PWR) w0.245: v1(16.197,69.694) 17.534,71.032 v1(20.332,71.032)
NetC59B_2: C59B.2 C60B.1 FB2B.2 IC9B.5 IC9B.7 IC9B.14 | length 18
  Top Layer w0.245: v1(11.131,34.393) 11.178,34.346 11.178,33.815 11.525,33.469 11.584,33.469 11.68,33.373 IC9B.14@11.942,33.373 ; IC9B.7@14.942,33.373 14.951,33.382 15.578,33.382 15.591,33.395 ; IC9B.5@14.954,32.361 16.09,32.361 v1(16.164,32.435) ; 15.55,33.393 15.571,33.414 16.219,33.414 C60B.1@16.238,33.433 16.238,32.51 v1(16.164,32.435) ; C59B.2@16.325,31.545 16.349,31.569 16.349,32.181 16.164,32.366 v1(16.164,32.435) ; FB2B.2@20.222,32.636 20.226,32.64 20.226,33.485 v1(20.23,33.489)
  Int2 (PWR) w0.245: v1(11.131,34.393) 14.839,34.393 15.208,34.024 15.208,33.392 v1(16.164,32.435) 17.639,32.435 19.048,33.845 19.316,33.845 19.622,33.538 20.181,33.538 v1(20.23,33.489)
NetC67_1: C67.1 R91.2 T14.2 | length 5.3
  Top Layer w0.245: T14.2@190.227,73.893 190.302,73.968 191.852,73.968 R91.2@191.902,73.918 ; R91.2@191.902,73.993 R91.2@191.902,73.918 ; R91.2@191.927,73.893 R91.2@191.902,73.918 ; C67.1@192.852,70.843 192.852,71.768 191.902,72.718 R91.2@191.902,73.918
NetC67_2: C67.2 U1.5 | length 2.3
  Top Layer w0.245: C67.2@192.852,69.943 192.874,69.921 192.874,67.691 U1.5@192.897,67.668
NetC74_2: C74.2 D13.4 FB4.1 R69.2 | length 5.6
  Top Layer w0.2: FB4.1@15.477,3.46 15.488,3.471 C74.2@16.631,3.471 ; C74.2@16.62,3.46 C74.2@16.631,3.471 ; D13.4@16.643,4.788 16.643,3.483 C74.2@16.631,3.471 ; R69.2@19.414,4.222 19.261,4.222 18.51,3.471 C74.2@16.747,3.471 C74.2@16.631,3.471
NetC83_2: C83.2 IC25.26 R86.1 | length 3.3
  Top Layer w0.2: R86.1@133.09,41.238 R86.1@133.11,41.238 ; R86.1@133.197,41.213 133.837,41.853 C83.2@133.837,42.618 134.462,43.243 IC25.26@135.217,43.243
NetC84_2: C84.2 IC25.33 | length 1.4
  Top Layer w0.2: C84.2@136.717,39.251 136.917,39.451 IC25.33@136.917,40.543
NetC85_2: C85.2 IC25.32 R85.1 | length 2.8
  Top Layer w0.2: R85.1@134.542,39.243 C85.2@135.717,39.243 136.417,39.943 IC25.32@136.417,40.543
NetC86_1: C86.1 IC25.36 | length 2.2
  Top Layer w0.2: IC25.36@138.417,40.543 138.419,40.541 138.419,39.991 139.216,39.194 139.216,38.649 C86.1@139.227,38.638
NetC86_2: C86.2 IC25.37 | length 2.7
  Top Layer w0.2: IC25.37@138.922,40.538 138.922,39.95 139.533,39.338 140.01,39.338 140.127,39.221 C86.2@140.127,38.638
NetC88_1: C88.1 IC25.31 R182.1 | length 9.1
  Top Layer w0.2: R182.1@134.318,34.972 134.346,34.943 C88.1@135.28,34.943 ; v1(135.167,40.493) IC25.31@135.867,40.493 ; C88.1@135.314,34.883 135.374,34.943 v1(136.59,34.943)
  Bottom Layer w0.2: v1(135.167,40.493) 135.167,36.366 v1(136.59,34.943)
NetC93_2: C93.2 R57.1 R68.2 U1.3 | length 4.4
  Top Layer w0.2: R57.1@190.927,60.443 R68.2@191.64,60.443 ; U1.3@191.627,62.768 191.64,62.755 R68.2@191.64,60.443 ; R68.2@191.782,60.568 191.657,60.443 R68.2@191.64,60.443 ; C93.2@191.927,59.443 191.852,59.443 191.64,59.655 R68.2@191.64,60.443
NetC96_1: C96.1 IC25.30 R183.1 | length 9.9
  Top Layer w0.2: R183.1@134.318,36.072 136.03,36.072 136.294,36.336 v1(136.709,36.336) ; v1(134.462,41.023) 134.543,41.023 134.744,41.224 135.198,41.224 IC25.30@135.217,41.243
  Bottom Layer w0.2: v1(134.462,41.023) 135.311,41.023 137.198,39.136 137.198,36.825 v1(136.709,36.336)
NetC99_1: C99.1 R51.1 R72.2 T13.4 | length 6.7
  Top Layer w0.2: R72.2@163.5,89.018 163.575,88.943 164.501,88.943 164.677,88.767 164.677,87.443 ; T13.4@164.227,86.048 164.44,86.048 164.677,86.285 164.677,87.369 164.751,87.443 C99.1@165.927,87.443 ; C99.1@165.927,87.393 166.477,87.943 R51.1@166.927,87.943
NetC102_2: C102.2 IC29.8 IC42.1 IC42.20 R154.2 R158.2 R179.1 | length 27.6
  Top Layer w0.2: 111.505,27.066 112.081,26.49 116.165,26.49 117.442,25.212 117.442,24.107 IC29.8@117.576,23.973
  Top Layer w0.3: R154.2@114,36.344 114.859,36.344 115.493,35.71 ; IC42.1@115.493,34.66 115.493,35.71 ; IC42.20@116.543,35.71 115.493,35.71
  Top Layer w0.5: R179.1@108.96,25.146 R179.1@110.385,25.146 ; R179.1@110.298,25.171 110.398,25.271 110.398,25.959 111.915,27.476 111.915,34.023 112.814,34.922 112.814,37.041 113.107,37.334 114.108,37.334
NetC112_2: C112.2 U1.2 | length 4.3
  Top Layer w0.2: C112.2@187.327,64.068 188.177,64.068 188.702,64.593 189.977,64.593 190.327,64.243 190.327,63.393 U1.2@190.402,63.318
NetC117A_2: C117A.2 L15A.2 L16A.1 | length 2.9
  Top Layer w0.245: L16A.1@15.876,63.57 17.406,63.57 L15A.2@18.789,63.57
NetC117B_2: C117B.2 L15B.2 L16B.1 | length 3.3
  Top Layer w0.245: L16B.1@15.589,26.71 17.093,26.71 18.551,26.71 18.714,26.548 L15B.2@18.714,26.483
NetC122_1: C122.1 IC37.11 L20.1 | length 5.6
  Top Layer w0.3: IC37.11@129.461,1.329 129.461,0.706 129.874,0.293 C122.1@129.874,-0.132 ; C122.1@129.764,-0.106 C122.1@129.79,-0.132 ; C122.1@129.79,-0.032 131.116,-0.032 131.966,0.818 L20.1@131.966,2.204
NetC122_2: C122.2 IC37.10 | length 1.5
  Top Layer w0.15: IC37.10@128.961,1.329 128.961,-0.141 C122.2@128.977,-0.157
NetC130_2: C130.2 IC37.5 | length 2.8
  Top Layer w0.3: C130.2@125.92,4.968 126.845,4.968 127.029,5.152 127.741,5.152 127.961,4.932 IC37.5@127.961,4.329
NetC131_2: C131.2 C134.2 IC37.4 | length 4.8
  Top Layer w0.3: C131.2@126.024,7.536 126.024,6.468 127.059,6.468 128.461,5.066 IC37.4@128.461,4.329
NetC142_1: C142.1 IC40.15 | length 2.2
  Top Layer w0.2: IC40.15@121.164,16.104 121.164,15.532 122.289,14.407 C142.1@122.314,14.407
NetC143_1: C143.1 IC40.12 | length 1.5
  Top Layer w0.3: C143.1@118.19,16.354 118.939,16.354 119.339,16.754 IC40.12@119.514,16.754
NetC143_2: C143.2 IC40.9 IC40.10 IC40.11 L21.2 | length 5.9
  Top Layer w0.3: L21.2@114.84,17.941 115.528,17.254 118.19,17.254 119.514,17.254 119.514,17.754 IC40.9@119.514,18.175
NetC144_2: C144.2 IC40.16 R139.2 | length 3.9
  Top Layer w0.2: IC40.16@121.664,16.104 121.669,16.099 121.669,15.609 121.85,15.428 R139.2@125.029,15.428
NetC145_2: C145.2 R139.1 | length 1.1
  Top Layer w0.152: C145.2@125.029,13.358 R139.1@125.029,14.488
NetC146_2: C146.2 IC41.14 | length 2.4
  Top Layer w0.2: IC41.14@123.68,52.61 C146.2@125.687,52.61 ; C146.2@125.422,52.586 C146.2@125.723,52.285
NetC147_2: C147.2 IC42.15 IC42.16 L22.2 R153.2 R158.1
NetC149_2: C149.2 IC42.14 | length 2.4
  Top Layer w0.3: IC42.14@120.193,34.01 122.57,34.01 C149.2@122.59,33.99
NetC154_2: C154.2 IC39.6 IC39.7 R115.2 T18.3 | length 84.8
  Top Layer w0.152: T18.3@186.177,6.843 186.177,8.065 186.377,8.265 186.732,8.265 v1(186.799,8.332) ; v1(190.963,40.21) 190.987,40.186 191.441,40.186 191.695,39.932
  Top Layer w0.2: R115.2@190.927,48.649 190.927,46.995 192.22,45.702 193.718,45.702 194.212,45.207 194.212,43.432 ; C154.2@191.491,38.868 191.491,39.728 191.695,39.932 191.899,40.136 193.831,40.136 194.212,40.517 194.212,42.245 ; IC39.7@192.891,42.251 194.205,42.251 194.212,42.245 ; IC39.6@192.891,43.521 194.123,43.521 194.212,43.432 ; 194.212,42.245 194.212,43.432
  Int2 (PWR) w0.152: v1(188.451,40.21) v1(190.963,40.21)
  Int2 (PWR) w0.2: v1(186.799,8.332) 194.97,8.332 197.868,11.229 207.757,11.229 209.529,13.002 209.529,14.416 202.075,21.87 198.728,21.87 189.902,30.696 189.902,37.243 188.451,38.695 v1(188.451,40.21)
NetC155_2: C155.2 IC39.5 | length 1.7
  Top Layer w0.2: C155.2@191.162,44.818 191.189,44.791 IC39.5@192.891,44.791
NetC166_2: C166.2 D7.1 R274.2 | length 2.8
  Top Layer w0.152: D7.1@202.436,40.921 C166.2@203.796,40.921 ; R274.2@202.454,42.199 R274.2@202.454,42.258
  Top Layer w0.2: D7.1@202.429,40.913 202.436,40.921 202.454,40.938 R274.2@202.454,42.199 R274.2@202.513,42.258
NetD1_2: D1.2 D7.2 IC39.2 | length 5.4
  Top Layer w0.2: IC39.2@198.291,42.251 200.375,42.251 200.778,41.849 D7.2@200.778,40.913 D1.2@200.778,39.15
NetD10_1: D10.1 D17.1 IC23.2 | length 6.5
  Top Layer w0.2: IC23.2@158.169,4.481 158.169,3.595 158.287,3.477 161.459,3.477 161.609,3.627 D10.1@161.609,3.732
  Top Layer w0.245: IC23.2@158.169,4.481 158.169,5.314 158.622,5.767 D17.1@158.622,6.287
NetD11A_2: D11A.2 D14A.1 | length 4.8
  Top Layer w0.245: D14A.1@18.877,60.043 18.877,60.418 19.726,61.267 19.726,61.353 19.917,61.544 21.726,61.544 22.075,61.195 22.075,60.895 D11A.2@22.277,60.693
NetD11B_2: D11B.2 D14B.1 | length 4.6
  Top Layer w0.245: D14B.1@18.5,23.8 18.5,24.059 18.877,24.437 21.531,24.437 21.865,24.103 22.008,23.96 22.012,23.96 22.214,23.757 D11B.2@22.214,23.557
NetD14A_2: D14A.2 D18A.1 | length 1.4
  Top Layer w0.245: D18A.1@13.934,60.043 D14A.2@15.377,60.043
NetD14B_2: D14B.2 D18B.1 | length 2.1
  Top Layer w0.245: D18B.1@13.334,23.186 13.334,23.423 13.712,23.8 D14B.2@15,23.8
NetD15_4: D15.4 J12.H2 R133.2 | length 25
  Top Layer w0.245: D15.4@181.527,1.793 183.077,1.793 R133.2@183.177,1.693 ; R133.2@183.169,1.793 183.173,1.797 183.173,2.402 v1(183.177,2.406)
  Int2 (PWR) w0.2: v1(183.177,2.406) 184.19,1.393 197.517,1.393 198.744,0.166 203.889,0.166 J12.H2@204.666,0.943
NetD15_6: D15.6 J12.K2 R138.2 | length 19.6
  Top Layer w0.2: R138.2@183.149,3.093 183.149,3.073 183.339,2.883 183.375,2.883 183.729,2.529 184.962,2.529 v1(184.988,2.503)
  Top Layer w0.245: D15.6@181.527,3.093 R138.2@183.077,3.093
  Int2 (PWR) w0.2: v1(184.988,2.503) 185.771,1.72 199.689,1.72 200.216,1.193 J12.K2@200.427,1.193
NetIC4_2: IC4.2 R16.2 | length 1.7
  Top Layer w0.508: R16.2@155.856,43.983 156.926,43.983 157.031,43.878 IC4.2@157.506,43.878
NetIC5_5: IC5.5 R28.1 R30.2 | length 8.3
  Top Layer w0.245: R28.1@164.027,77.599 166.085,77.599 166.97,76.714 167.606,76.714 167.727,76.593 167.727,75.079 167.377,74.729 166.846,74.729 166.414,74.298 166.414,73.292 IC5.5@166.406,73.283
NetIC5_10: IC5.10 R17.1 | length 2.2
  Top Layer w0.2: IC5.10@166.406,70.383 166.406,69.81 166.523,69.693 166.905,69.693 167.655,68.943 R17.1@167.677,68.943
NetIC6_6: IC6.6 R37.2 | length 1.7
  Top Layer w0.2: R37.2@155.681,50.598 IC6.6@157.405,50.598
NetIC6_7: IC6.7 R35.2 | length 1.7
  Top Layer w0.2: R35.2@155.681,49.328 IC6.7@157.405,49.328
NetIC8_1: IC8.1 IC28.2 R102.1 R103.2 | length 20.5
  Top Layer w0.2: IC28.2@134.336,75.529 134.336,76.808 134.854,77.325 136.342,77.325 137.044,76.623 137.044,66.287 136.582,65.826 R103.2@136.582,64.883 R102.1@137.527,64.883 ; R102.1@137.527,64.913 138.336,64.913 138.453,65.03 IC8.1@138.453,67.183
NetIC8_5: IC8.5 R80.1 R81.2 | length 3
  Top Layer w0.2: IC8.5@143.533,67.183 143.533,65.762 143.967,65.328 R80.1@143.967,65.308 144.935,65.308 R81.2@144.951,65.324
NetIC9A_10: IC9A.10 R24A.1 | length 4.9
  Top Layer w0.2: IC9A.10@13.802,71.869 13.802,72.559 13.919,72.676 17.303,72.676 17.444,72.536 R24A.1@17.444,72.064
NetIC9B_10: IC9B.10 R24B.1 | length 5.2
  Top Layer w0.2: IC9B.10@13.692,34.623 13.692,35.2 14.028,35.536 17.416,35.536 17.534,35.419 R24B.1@17.534,34.793
NetIC10A_1: IC10A.1 IC11A.4 R23A.2 | length 29
  Top Layer w0.2: R23A.2@39.587,72.288 39.801,72.074 40.546,72.074 IC10A.1@40.677,71.943 ; IC10A.1@40.917,71.873 41.167,71.873 41.719,71.321 41.719,71.081 41.883,70.916 44.003,70.916 44.642,70.277 44.642,69.264 45.772,68.135 52.377,68.135 54.177,69.934 54.177,71.605 55.435,72.863 57.257,72.863 59.177,70.943 59.427,70.943 60.592,69.778 61.334,69.778 61.493,69.618 IC11A.4@62.102,69.618